# Altium PCB Switcher.PcbDoc (part 1 of 3)
Units mm, origin at the board's own origin, x right, y up, seen from the top; angles counter-clockwise.
Board outline 152.4 x 101.6 mm, 2 copper layers (Top Layer, Bottom Layer); 59 components, 74 nets, 310 pads, 234 vias.
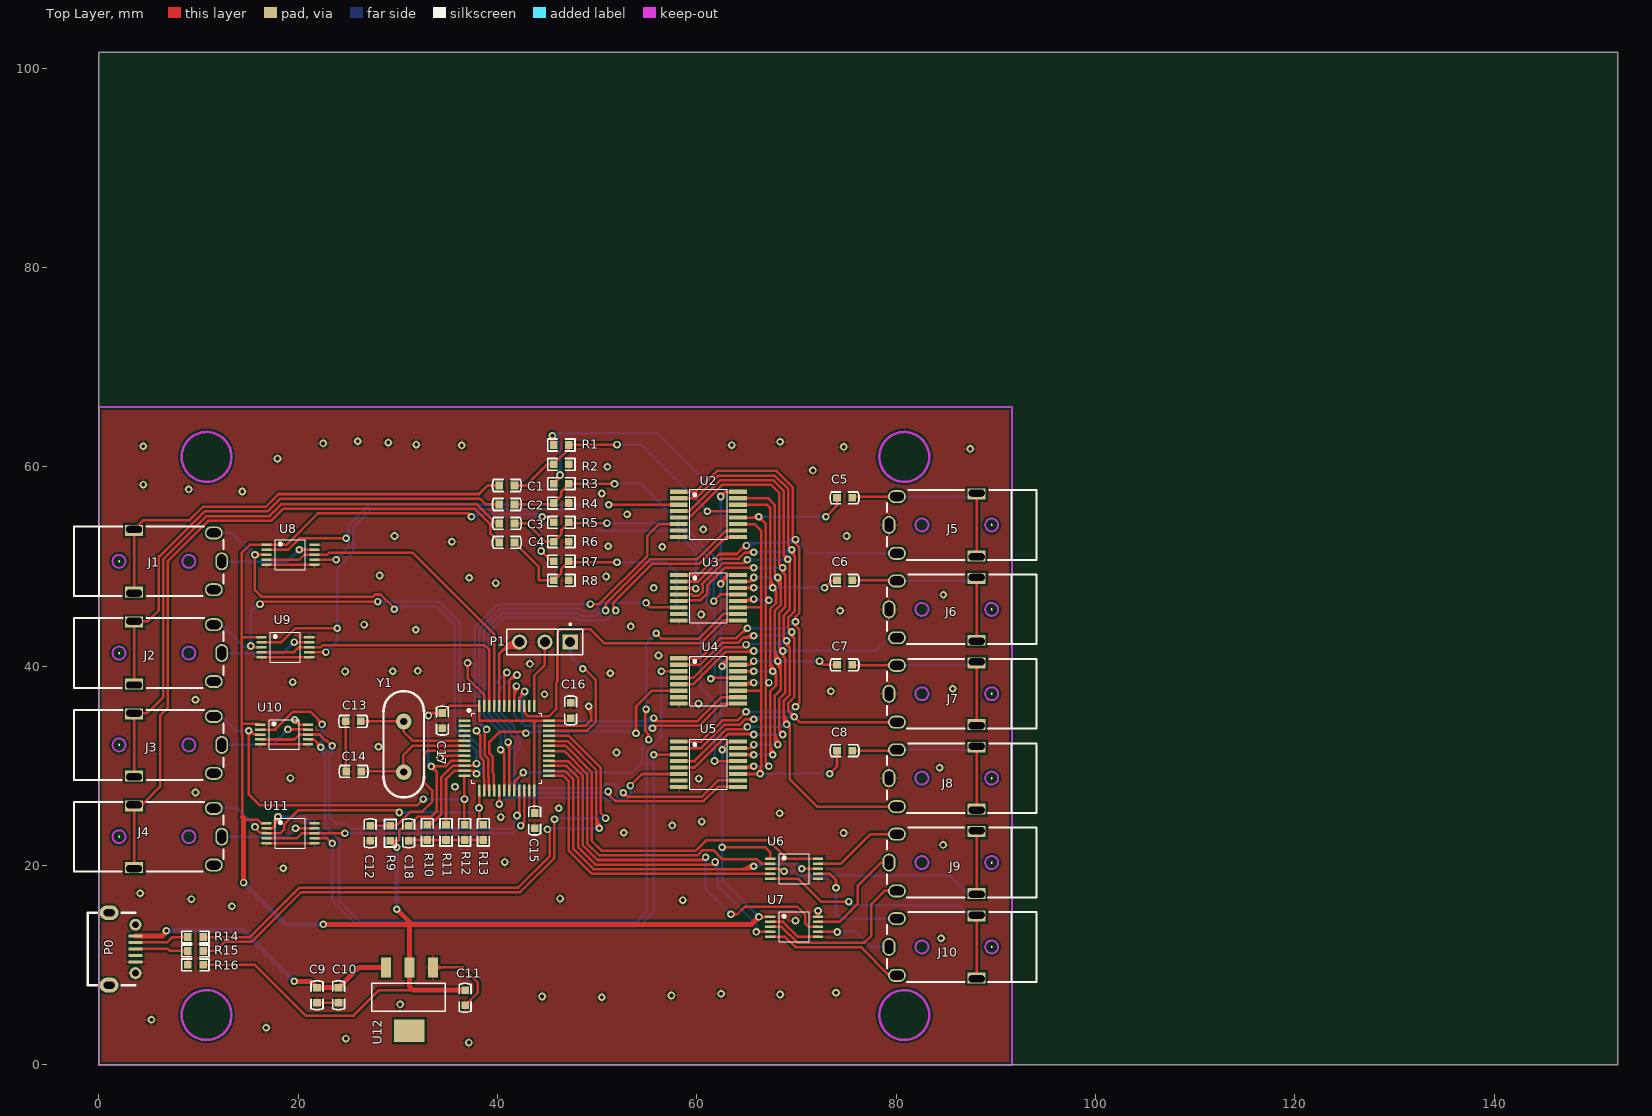
[diagram p0: Top Layer view]
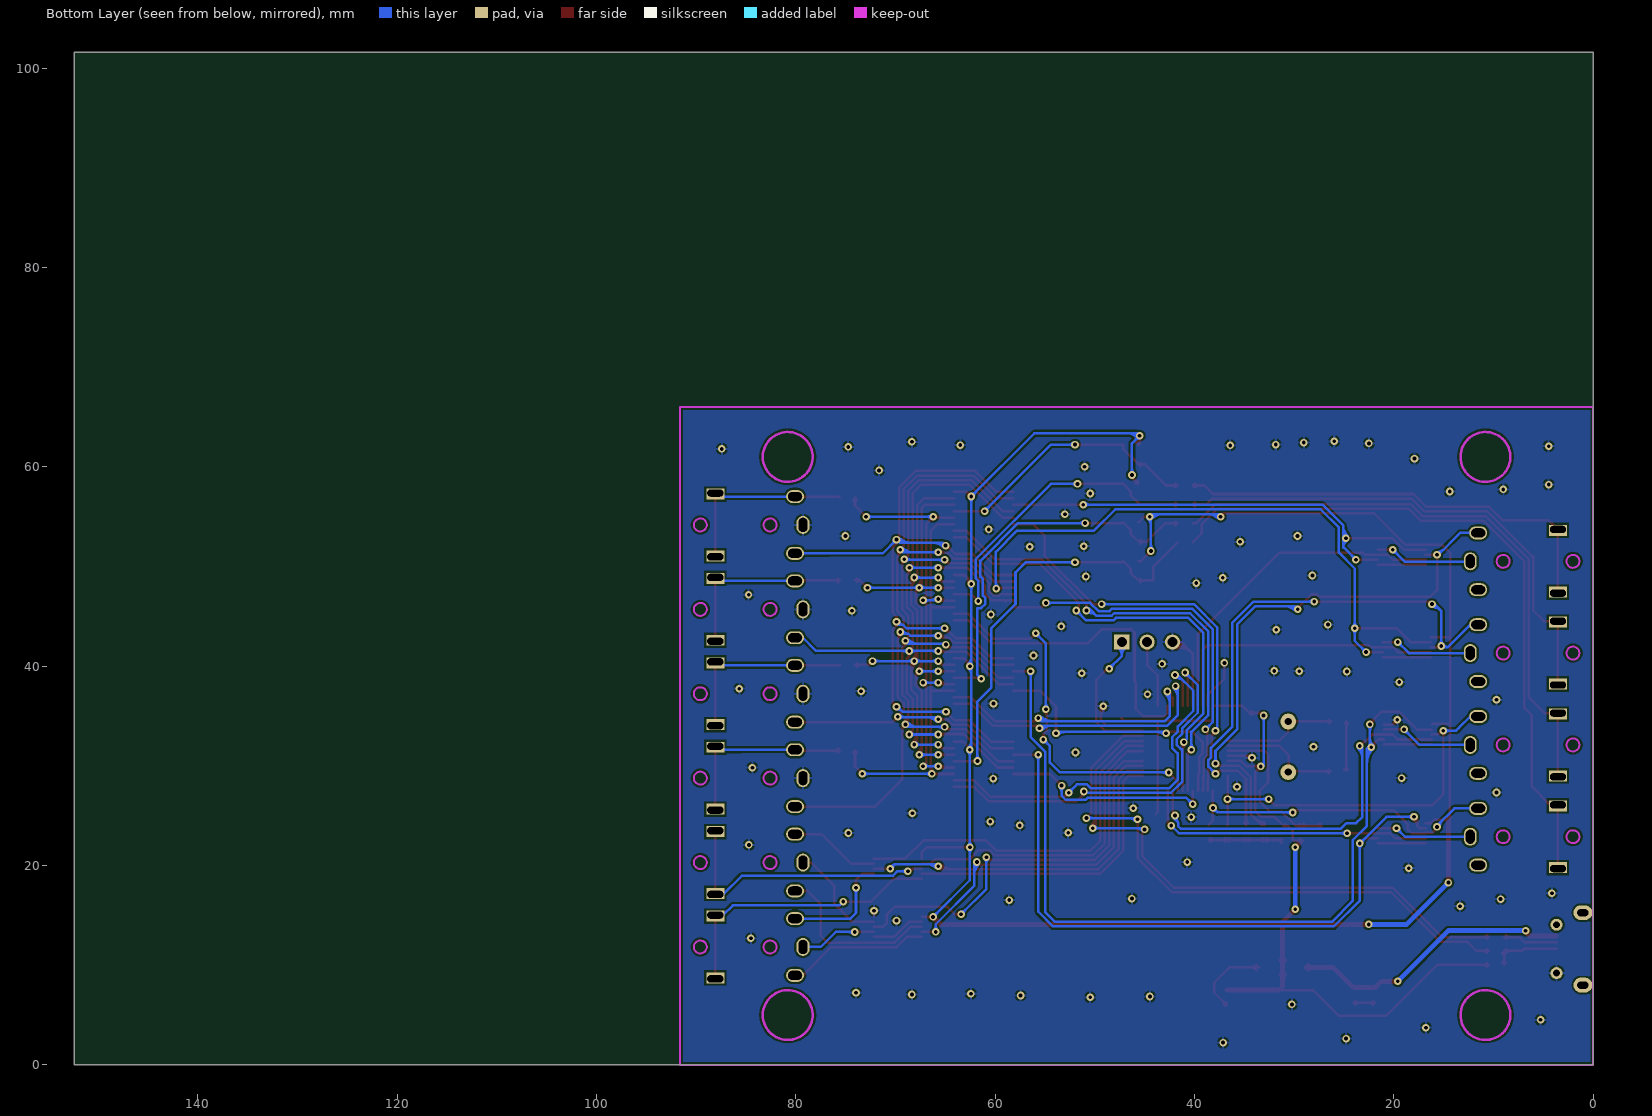
[diagram p1: Bottom Layer view, seen from below]

## Layer stack, top to bottom
Top Layer: signal copper 0.0356
Dielectric: dielectric 0.32, FR-4, Dk 4.8
Bottom Layer: signal copper 0.0356

## Board outline
-0.013,0 152.387,0 152.387,101.6 -0.013,101.6

## Design rules (kind name [scope] priority, off if disabled: settings)
Clearance Clearance_1 [All] p1 off: gap=0.254
Clearance [All] p2: gap=0.203
ComponentClearance [All] p1 off: gap=0.2 collisioncheckmode=3 verticalgap=0.2 showdistances=FALSE
HoleToHoleClearance [All] p1: gap=0.1 allowstackedmicrovias=TRUE
MinimumSolderMaskSliver [All] p1: minsoldermaskwidth=0.1
PolygonConnect [All] p1: connectstyle=Relief reliefconductorwidth=0.254 reliefentries=4 polygonreliefangle="90 Angle"
RoutingVias [All] p1: holewidth=0.711 width=1.27 viastyle="Through Hole" minholewidth=0.254 minwidth=0.508 maxholewidth=0.762 maxwidth=1.27
SilkToSilkClearance [All] p1: silktosilkclearance=0.1
SilkscreenOverComponentPads [All] p1: minsilkscreentomaskgap=0.1
SolderMaskExpansion [All] p1: expansion=0
Width [All] p1: maxlimit=0.5 minlimit=0.203 preferedwidth=0.254 minimp=50.000000 maximp=50.000000 favimp=50.000000
23 further rules are at their usual default settings.

## Components (designator, comment, footprint, x,y, rotation, side; value= is the part's Value field where it differs from the comment)
C1 "" 1608(0603C) 40.17,58.13 r0 top
C2 "" 1608(0603C) 40.17,56.225 r0 top
C3 "" 1608(0603C) 40.17,54.32 r0 top
C4 "" 1608(0603C) 40.17,52.415 r0 top
C5 "" 1608(0603C) 74.054,56.896 r0 top
C6 "" 1608(0603C) 74.054,48.616 r0 top
C7 "" 1608(0603C) 74.054,40.132 r0 top
C8 "" 1608(0603C) 74.054,31.521 r0 top
C9 "" 1608(0603C) 21.882,6.223 r90 top
C10 "" 1608(0603C) 24.041,6.223 r90 top
C11 "" 1608(0603C) 36.741,5.969 r90 top
C12 "" 1608(0603C) 27.216,22.479 r90 top
C13 "" 1608(0603C) 24.747,34.468 r0 top
C14 "" 1608(0603C) 24.798,29.439 r0 top
C15 "" 1608(0603C) 43.726,23.749 r90 top
C16 "" 1608(0603C) 47.327,36.322 r270 top
C17 "" 1608(0603C) 34.455,33.782 r90 top
C18 "" 1608(0603C) 31.084,22.479 r90 top
J1 "" PJ-322 -2.477,54.026 r0 top
J2 "" PJ-322 -2.477,44.814 r0 top
J3 "" PJ-322 -2.477,35.602 r0 top
J4 "" PJ-322 -2.477,26.391 r0 top
J5 "" PJ-322 94.069,50.673 r180 top
J6 "" PJ-322 94.069,42.205 r180 top
J7 "" PJ-322 94.069,33.736 r180 top
J8 "" PJ-322 94.069,25.268 r180 top
J9 "" PJ-322 94.069,16.8 r180 top
J10 "" PJ-322 94.069,8.331 r180 top
P0 "" USB_MICRO 3.67,11.633 r90 top
P1 "" SIP3 47.282,42.418 r180 top
R1 "" 1608(0603R) 47.155,62.194 r180 top
R2 "" 1608(0603R) 47.155,60.252 r180 top
R3 "" 1608(0603R) 47.155,58.311 r180 top
R4 "" 1608(0603R) 47.155,56.37 r180 top
R5 "" 1608(0603R) 47.155,54.429 r180 top
R6 "" 1608(0603R) 47.155,52.487 r180 top
R7 "" 1608(0603R) 47.155,50.546 r180 top
R8 "" 1608(0603R) 47.155,48.605 r180 top
R9 "" 1608(0603R) 29.248,24.003 r270 top
R10 "" 1608(0603R) 32.954,22.563 r90 top
R11 "" 1608(0603R) 34.824,22.563 r90 top
R12 "" 1608(0603R) 36.694,22.563 r90 top
R13 "" 1608(0603R) 38.564,22.563 r90 top
R14 "" 1608(0603R) 8.928,12.827 r0 top
R15 "" 1608(0603R) 8.928,11.43 r0 top
R16 "" 1608(0603R) 8.928,10.033 r0 top
U1 "f103c8t6" LQFP48 40.927,31.775 r0 top
U2 "SGM4782" TSSOP-16 58.179,57.506 r0 top
U3 "SGM4782" TSSOP-16 58.179,49.149 r0 top
U4 "SGM4782" TSSOP-16 58.179,40.792 r0 top
U5 "SGM4782" TSSOP-16 58.179,32.436 r0 top
U6 "SGM3005" MSOP-10 69.761,19.685 r0 top
U7 "SGM3005" MSOP-10 69.761,13.843 r0 top
U8 "SGM3005" MSOP-10 19.215,51.181 r0 top
U9 "SGM3005" MSOP-10 18.707,41.91 r0 top
U10 "SGM3005" MSOP-10 18.58,33.147 r0 top
U11 "SGM3005" MSOP-10 19.215,23.241 r0 top
U12 "" SOT-223 31.153,6.604 r90 top
Y1 "8MHz" XTAL1 30.589,34.442 r270 top

## Footprints (in the part's own frame and the unit in brackets; to place one, negate y for a bottom-side part, rotate by r counter-clockwise, add the part's x,y. Pads: shape width x height; smd on the part's side, far side on the other; paste and mask are expansions set on the pad)
1608(0603C) [mil]
  rect 30x30 smd: 1(0,0) 2(60,0)
  silkscreen extent -27,-23 87,23
1608(0603R) [mil]
  rect 30x30 smd: 1(0,0) 2(60,0)
  silkscreen extent -24,-23 84,23
LQFP48 [mm]
  rect 1.2x0.25 smd: 1(-4.25,2.75) 2(-4.25,2.25) 3(-4.25,1.75) 4(-4.25,1.25) 5(-4.25,0.75) 6(-4.25,0.25) 7(-4.25,-0.25) 8(-4.25,-0.75) 9(-4.25,-1.25) 10(-4.25,-1.75) 11(-4.25,-2.25) 12(-4.25,-2.75) 25(4.25,-2.75) 26(4.25,-2.25) 27(4.25,-1.75) 28(4.25,-1.25) 29(4.25,-0.75) 30(4.25,-0.25) 31(4.25,0.25) 32(4.25,0.75) 33(4.25,1.25) 34(4.25,1.75) 35(4.25,2.25) 36(4.25,2.75)
  rect 0.25x1.2 smd: 13(-2.75,-4.25) 14(-2.25,-4.25) 15(-1.75,-4.25) 16(-1.25,-4.25) 17(-0.75,-4.25) 18(-0.25,-4.25) 19(0.25,-4.25) 20(0.75,-4.25) 21(1.25,-4.25) 22(1.75,-4.25) 23(2.25,-4.25) 24(2.75,-4.25) 37(2.75,4.25) 38(2.25,4.25) 39(1.75,4.25) 40(1.25,4.25) 41(0.75,4.25) 42(0.25,4.25) 43(-0.25,4.25) 44(-0.75,4.25) 45(-1.25,4.25) 46(-1.75,4.25) 47(-2.25,4.25) 48(-2.75,4.25)
  silkscreen extent -3.92,-3.5 3.5,3.92
MSOP-10 [mm]
  rect 1.02x0.25 smd: 1(-2.4,1) 2(-2.4,0.5) 3(-2.4,0) 4(-2.4,-0.5) 5(-2.4,-1) 6(2.4,-1) 7(2.4,-0.5) 8(2.4,0) 9(2.4,0.5) 10(2.4,1)
  silkscreen extent -1.5,-1.5 1.5,1.5
PJ-322 [mm]
  rect 1.8x1.1 hole 0.7 slot 1.6 at 0 deg copper offset 0,0.1: 1(6,-6.7)
  rect 1.8x1.1 hole 0.7 slot 1.6 at 0 deg copper offset 0,-0.1: 1(6,-0.3)
  oval 1.8x1.3 hole 0.9 slot 1.4 at 0 deg: 2(14,-6.35) 3(14,-0.65)
  oval 1.3x1.8 hole 0.9 slot 1.4 at 90 deg: 4(14.8,-3.5)
  Keep-Out Layer circle w0.2: c11.5,-3.5 r0.65
  Keep-Out Layer circle w0.2: c4.5,-3.5 r0.65
  silkscreen extent 0,-7 15,0
SIP3 [mil]
  rect 60x60 hole 40: 1(0,0)
  round 60 hole 40: 2(100,0) 3(200,0)
  silkscreen extent -50,-72 250,50
SOT-223 [mil]
  rect 80x40 smd: 1(125,-93) 2(125,0) 3(125,93)
  rect 90x120 smd: 4(-125,0)
  silkscreen extent -48,-141 62,149
TSSOP-16 [mm]
  rect 1.78x0.42 smd: 1(0,0) 2(0,-0.65) 3(0,-1.3) 4(0,-1.95) 5(0,-2.6) 6(0,-3.25) 7(0,-3.9) 8(0,-4.55) 9(5.94,-4.55) 10(5.94,-3.9) 11(5.94,-3.25) 12(5.94,-2.6) 13(5.94,-1.95) 14(5.94,-1.3) 15(5.94,-0.65) 16(5.94,0)
  silkscreen extent 1.09,-4.77 4.85,0.23
USB_MICRO [mil] "USB Micro SMT 5S B"
  rect 11.81x54 smd: 1(51,0) 2(25.5,0) 3(0,0) 4(-25.5,0) 5(-51,0)
  oval 59.06x74.8 hole 27.56 slot 43.31 at 90 deg: 6(-143,104) 6(143,104)
  round 47.24 hole 27.5: 6(-95.5,0) 6(95.5,0)
  silkscreen extent -143,0 143,189
XTAL1 [mil]
  round 62 hole 28: 1(-0.36,-0.2) 2(199.64,-0.2)
  silkscreen extent -120,-80 300,80

## Part data
C1 C2 C3 C4 C5 C6 C7 C8 C9 C10 C11 C12 C13 C14 C15 C16 C17 C18: library part Cap, "Capacitor"
J1 J2 J3 J4 J6 J7 J8: library part seg-4
J5: library part seg-4, "OMTP"
J9 J10: library part CON4
P0: library part micro_usb
P1: library part "Header 3", "Header, 3-Pin"
R1 R2 R3 R4 R5 R6 R7 R8 R9 R10 R11 R12 R13 R14 R15 R16: library part Res3, "Resistor"
U12: library part ASM1117-3.3
Y1: library part XTAL, "Crystal Oscillator"

## Free pads (board coordinates)
  round 0 on Mech1: EndPad(64.119,31.786)
  round 0.254 smd: StartPad(64.119,56.856)

## Via types
v1: diameter 0.762, hole 0.381, Top Layer to Bottom Layer, 152 vias
v2: diameter 0.76, hole 0.38, Top Layer to Bottom Layer, 80 vias
v3: diameter 0.72, hole 0.38, Top Layer to Bottom Layer, 2 vias

## Nets (pads, with @x,y where several pads share a name; then routed paths per layer and width w, separated by ;. In a path a pad name is that pad's centre, name@x,y a point inside that pad or via, vN(x,y) a via of type N, cw(c..) or ccw(c..) an arc to the next point about the centre after c; other vN are vias at no path point)
3V3: C11.2 C15.2 C16.2 C17.2 C18.2 R1.2 R3.2 R5.2 R7.2 R9.2 R16.2 U1.9 U1.24 U1.36 U1.48 U2.16 U3.16 U4.16 U5.16 U6.1 U7.1 U8.1 U9.1 U10.1 U11.1 U12.2 | length 387.2
  Top Layer w0.254: R16.2@10.452,10.033 15.659,10.033 20.739,4.953 25.565,4.953 28.105,7.493 31.534,7.493 ; 14.329,42.91 U9.1@16.307,42.91 ; 14.364,34.239 16.088,34.239 U10.1@16.18,34.147 ; 14.389,24.892 14.389,33.081 14.313,33.157 14.313,51.359 15.135,52.181 U8.1@16.815,52.181 18.807,52.181 21.973,55.347 37.02,55.347 ; 14.516,24.765 14.694,24.587 15.954,24.587 16.3,24.241 U11.1@16.815,24.241 ; R9.2@29.248,22.479 30.01,22.479 30.137,22.606 30.137,23.495 30.645,24.003 ; v1(33.058,35.052) 33.312,35.306 C17.2@34.455,35.306 35.174,36.025 U1.48@38.177,36.025 38.177,34.544 43.609,34.544 43.677,34.476 ; v1@33.337,29.693 cw(c33.337,29.079) 33.771,29.513 cw(c34.205,29.947) v1@33.591,29.947 ; v1@33.517,29.767 cw(c33.951,29.333) 33.951,29.947 cw(c33.951,30.56) v1@33.517,30.126 ; U1.9@36.677,30.525 35.367,30.525 34.788,29.947 v1(33.337,29.947) 33.91,29.374 33.91,25.49 33.312,24.892 31.973,24.892 C18.2@31.084,24.003 30.645,24.003 ; v1(37.376,54.991) 37.02,55.347 ; C15.2@43.898,25.146 43.677,25.368 U1.24@43.677,27.525 43.677,34.476 ; v1(44.361,51.562) 45.377,50.546 R7.2@45.631,50.546 ; v1(44.488,54.991) 45.069,54.991 R5.2@45.631,54.429 ; v1@45.406,62.873 ccw(c46.136,63.069) R1.2@45.758,62.414 ; R1.2@45.411,62.321 ccw(c45.004,62.556) 45.458,62.677 ; v1(45.504,63.119) 45.504,62.321 R1.2@45.631,62.194 ; R3.2@45.631,58.311 46.266,58.946 v1(46.266,59.182) ; C16.2@47.327,34.798 47.055,34.525 U1.36@45.177,34.525 43.726,34.525 43.677,34.476 ; v1(62.522,21.844) 66.84,21.844 67.361,21.323 U6.1@67.361,20.685 ; v1(62.537,31.608) 62.537,31.771 63.202,32.436 U5.16@64.119,32.436 ; 62.715,57.363 ccw(c62.83,56.934) v1(62.395,57.023) ; 62.735,57.343 cw(c62.306,57.458) v1(62.395,57.023) ; 62.775,48.731 cw(c62.055,48.924) v1(62.395,48.26) ; 62.868,40.545 cw(c62.044,40.693) v1(62.522,40.005) ; U4.16@64.119,40.792 63.055,40.792 ; U3.16@64.119,49.149 63.03,49.149 62.395,48.514 v1(62.395,48.26) ; U2.16@64.119,57.506 62.878,57.506 v1(62.395,57.023) ; v1(66.221,14.843) U7.1@67.361,14.843 ; 11.065,10.033 cw(c11.065,10.646) 10.632,10.213 ccw(c11.065,10.646) 11.065,10.033 ; 11.065,10.033 ccw(c11.065,9.42) 10.632,9.853 cw(c11.065,9.42) 11.065,10.033 ; 29.861,22.479 cw(c29.861,23.092) 29.428,22.659 ccw(c29.861,23.092) 29.861,22.479 ; 29.861,22.479 ccw(c29.861,21.866) 29.428,22.299 cw(c29.861,21.866) 29.861,22.479 ; 30.645,24.003 cw(c30.645,23.751) 30.863,23.877 ccw(c30.645,23.751) 30.645,24.003 ; 30.645,24.003 ccw(c30.645,24.255) 30.863,24.129 cw(c30.645,24.255) 30.645,24.003 ; 33.842,35.306 cw(c33.842,34.693) 34.275,35.126 ccw(c33.842,34.693) 33.842,35.306 ; 33.842,35.306 ccw(c33.842,35.919) 34.275,35.486 cw(c33.842,35.919) 33.842,35.306 ; 37.02,55.347 cw(c36.757,55.084) 37.125,55.029 ccw(c36.757,55.084) 37.02,55.347 ; 37.02,55.347 ccw(c37.283,55.61) 37.338,55.242 cw(c37.283,55.61) 37.02,55.347 ; v1@45.396,62.889 cw(c45.2,62.474) 45.644,62.593 ; v1@45.396,62.889 cw(c45.2,62.474) 45.644,62.593 ; v1@45.396,62.889 cw(c45.2,62.474) 45.644,62.593 ; R1.2@45.504,62.506 cw(c46.117,62.506) 45.684,62.939 ccw(c46.117,62.506) R1.2@45.504,62.506 ; R1.2@45.504,62.506 ccw(c44.891,62.506) 45.324,62.939 cw(c44.891,62.506) R1.2@45.504,62.506 ; 45.644,62.593 cw(c46.083,62.71) v1@45.711,62.972 ; 45.644,62.593 cw(c46.083,62.71) v1@45.711,62.972 ; 45.644,62.593 cw(c46.083,62.71) v1@45.711,62.972 ; 46.065,58.745 cw(c45.631,59.178) 45.631,58.565 ccw(c45.631,59.178) 46.065,58.745 ; 46.065,58.745 ccw(c46.498,58.311) 45.885,58.311 cw(c46.498,58.311) 46.065,58.745 ; v1(62.395,48.26) cw(c63.008,48.26) 62.575,48.694 ccw(c63.008,48.26) v1(62.395,48.26) ; v1(62.522,40.005) cw(c63.027,40.047) 62.669,40.406 ccw(c63.027,40.047) v1(62.522,40.005) ; v1(62.522,40.005) 62.522,40.259 63.055,40.792 ; 62.829,57.457 cw(c62.395,57.89) 62.395,57.277 ccw(c62.395,57.89) 62.829,57.457 ; 62.829,57.457 ccw(c63.262,57.023) 62.649,57.023 cw(c63.262,57.023) 62.829,57.457 ; 63.055,40.792 ccw(c63.74,40.108) 62.775,40.026 cw(c63.74,40.108) 63.055,40.792 ; 66.834,14.843 cw(c66.834,15.456) 66.401,15.023 ccw(c66.834,15.456) 66.834,14.843 ; 66.834,14.843 ccw(c66.834,14.23) 66.401,14.663 cw(c66.834,14.23) 66.834,14.843 ; 15.578,34.239 cw(c15.578,33.93) 15.796,34.148 ccw(c15.578,33.93) 15.578,34.239 ; 16.211,24.33 ccw(c16.43,24.549) 16.43,24.239 cw(c16.43,24.549) 16.211,24.33 ; v1@45.504,63.114 ccw(c46.551,63.114) 45.811,62.373 cw(c46.551,63.114) v1@45.504,63.114 ; v1@62.649,48.26 cw(c63.875,48.26) 63.008,49.127 ccw(c63.875,48.26) v1@62.649,48.26
  Top Layer w0.5: 14.389,24.892 14.516,24.765 v1(14.516,18.288) ; v1(22.517,14.097) 31.153,14.097 ; R9.2@29.248,22.479 v1(29.883,21.844) ; v1(29.883,15.621) 31.153,14.351 31.153,14.097 ; C11.2@36.741,7.493 31.534,7.493 31.153,7.874 U12.2@31.153,9.779 31.153,14.097 ; v1(66.221,14.843) 65.475,14.097 31.153,14.097 ; 31.153,8.648 cw(c31.776,8.648) 31.335,9.089 ccw(c31.776,8.648) 31.153,8.648 ; 31.153,8.648 ccw(c30.53,8.648) 30.971,9.089 cw(c30.53,8.648) 31.153,8.648 ; 31.153,10.91 cw(c30.53,10.91) 30.971,10.469 ccw(c30.53,10.91) 31.153,10.91 ; 31.153,10.91 ccw(c31.776,10.91) 31.335,10.469 cw(c31.776,10.91) 31.153,10.91
  Bottom Layer w0.254: v1(33.058,35.052) 33.058,30.023 33.134,29.947 v1(33.337,29.947) ; v1@37.499,55.213 ccw(c37.63,55.449) 37.765,55.215 ccw(c37.9,54.982) v1@37.63,54.987 ; v1@37.545,55.18 ccw(c37.86,55.533) 38.097,55.124 ; 37.792,54.948 cw(c37.614,55.257) v1(37.376,54.991) ; 43.767,55.124 ccw(c44.004,55.533) v1@44.319,55.18 ; 44.072,54.948 ccw(c44.25,55.257) v1(44.488,54.991) ; v1@44.234,54.987 ccw(c43.964,54.982) 44.099,55.215 ccw(c44.234,55.449) v1@44.365,55.213 ; v1(44.361,51.562) 44.361,54.864 v1(44.488,54.991) ; v1@45.627,63.341 ccw(c45.758,63.577) 45.893,63.343 ccw(c46.028,63.11) v1@45.758,63.115 ; v1@45.673,63.308 ccw(c45.988,63.661) 46.225,63.252 ; 45.92,63.076 cw(c45.742,63.385) v1(45.504,63.119) ; v1(46.266,59.182) 46.266,62.357 v1(45.504,63.119) ; v1(66.221,14.843) 62.537,18.527 v1(62.537,31.608) 62.395,31.75 v1(62.395,48.26) v1(62.395,57.023) 56.045,63.373 45.758,63.373 v1(45.504,63.119) ; 33.058,34.439 cw(c33.671,34.439) 33.238,34.872 ccw(c33.671,34.439) 33.058,34.439 ; 33.058,34.439 ccw(c32.445,34.439) 32.878,34.872 cw(c32.445,34.439) 33.058,34.439 ; v1(37.376,54.991) cw(c37.989,54.378) 37.989,55.245 ccw(c37.989,54.378) v1(37.376,54.991) ; v1(37.376,54.991) 37.376,55.118 37.503,55.245 44.234,55.245 v1(44.488,54.991) ; 44.361,52.175 cw(c43.748,52.175) 44.181,51.742 ccw(c43.748,52.175) 44.361,52.175 ; 44.361,52.175 ccw(c44.974,52.175) 44.541,51.742 cw(c44.974,52.175) 44.361,52.175 ; v1(44.488,54.991) ccw(c43.875,54.378) 43.875,55.245 cw(c43.875,54.378) v1(44.488,54.991) ; v1(45.504,63.119) cw(c46.117,62.506) 46.117,63.373 ccw(c46.117,62.506) v1(45.504,63.119) ; 45.938,62.685 cw(c46.371,63.119) 45.758,63.119 ccw(c46.371,63.119) 45.938,62.685 ; 45.938,62.685 ccw(c45.504,62.252) 45.504,62.865 cw(c45.504,62.252) 45.938,62.685 ; 46.266,59.795 cw(c45.653,59.795) 46.086,59.362 ccw(c45.653,59.795) 46.266,59.795 ; 46.266,59.795 ccw(c46.879,59.795) 46.446,59.362 cw(c46.879,59.795) 46.266,59.795 ; 61.961,57.457 cw(c61.528,57.023) 62.141,57.023 ccw(c61.528,57.023) 61.961,57.457 ; 61.961,57.457 ccw(c62.395,57.89) 62.395,57.277 cw(c62.395,57.89) 61.961,57.457 ; 62.395,47.647 cw(c63.008,47.647) 62.575,48.08 ccw(c63.008,47.647) 62.395,47.647 ; 62.395,47.647 ccw(c61.782,47.647) 62.215,48.08 cw(c61.782,47.647) 62.395,47.647 ; 62.395,56.41 cw(c63.008,56.41) 62.575,56.843 ccw(c63.008,56.41) 62.395,56.41 ; 62.395,56.41 ccw(c61.782,56.41) 62.215,56.843 cw(c61.782,56.41) 62.395,56.41 ; 62.537,30.995 cw(c63.15,30.995) 62.716,31.429 ccw(c63.15,30.995) 62.537,30.995 ; 62.537,30.995 ccw(c61.923,30.995) 62.357,31.429 cw(c61.923,30.995) 62.537,30.995 ; 65.787,15.277 cw(c65.354,14.843) 65.967,14.843 ccw(c65.354,14.843) 65.787,15.277 ; 65.787,15.277 ccw(c66.221,15.71) 66.221,15.097 cw(c66.221,15.71) 65.787,15.277 ; v1@37.556,54.811 cw(c38.602,53.765) 38.602,55.245 ccw(c38.602,53.765) v1@37.556,54.811 ; 43.262,55.245 cw(c43.262,53.765) 44.308,54.811 ccw(c43.262,53.765) 43.262,55.245 ; 44.361,54.071 cw(c45.408,54.071) 44.668,54.811 ccw(c45.408,54.071) 44.361,54.071 ; v1@45.684,62.939 cw(c46.73,61.893) 46.73,63.373 ccw(c46.73,61.893) v1@45.684,62.939 ; v1@62.342,21.664 cw(c61.873,21.195) 62.537,21.195 ccw(c61.873,21.195) v1@62.342,21.664 ; v1@62.342,22.024 ccw(c61.873,22.493) 62.537,22.493 cw(c61.873,22.493) v1@62.342,22.024 ; 62.395,32.564 ccw(c63.492,32.564) 62.716,31.788 cw(c63.492,32.564) 62.395,32.564 ; 62.395,39.085 cw(c63.442,39.085) 62.702,39.825 ccw(c63.442,39.085) 62.395,39.085 ; 62.395,40.925 ccw(c63.442,40.925) 62.702,40.185 cw(c63.442,40.925) 62.395,40.925 ; 62.537,21.266 cw(c63.1,21.266) 62.702,21.664 ccw(c63.1,21.266) 62.537,21.266 ; 62.537,22.422 ccw(c63.1,22.422) 62.702,22.024 cw(c63.1,22.422) 62.537,22.422
  Bottom Layer w0.5: v1(14.516,18.288) 18.707,14.097 v1(22.517,14.097) ; v1(29.883,15.621) v1(29.883,21.844)
5V: C9.2 C10.2 P0.1 U12.3 | length 31.6
  Top Layer w0.5: P0.1@3.67,12.929 6.363,12.929 6.769,13.335 v1(6.769,13.462) ; v1(19.596,8.382) 21.247,8.382 C9.2@21.882,7.747 C10.2@24.041,7.747 26.073,9.779 U12.3@28.791,9.779 ; 28.168,9.779 cw(c28.168,9.156) 28.608,9.597 ccw(c28.168,9.156) 28.168,9.779 ; 28.168,9.779 ccw(c28.168,10.402) 28.608,9.961 cw(c28.168,10.402) 28.168,9.779 ; 6.456,13.022 ccw(c6.015,13.462) 6.638,13.462 cw(c6.015,13.462) 6.456,13.022
  Bottom Layer w0.5: v1(6.769,13.462) 14.516,13.462 v1(19.596,8.382)
GND: C9.1 C10.1 C11.1 C12.1 C13.1 C14.1 C15.1 C16.1 C17.1 C18.1 J5.4 J6.4 J7.4 J8.4 P0.5 P0.6@3.67,9.207 P1.3 R2.1 R4.1 R6.1 R8.1 R10.1 R11.1 R12.1 R13.1 U1.8 U1.23 U1.35 U1.44 U1.47 U2.8 U3.8 U4.8 U5.8 U6.6 U7.2 U7.6 U7.10 U8.5 U8.6 U8.10 U9.5 U9.6 U9.10 U10.5 U10.6 U10.10 U11.5 U11.6 U11.10 U12.1 | length 121.8
  Top Layer w0.254: U10.5@16.18,32.147 U10.6@20.98,32.147 ; U9.5@16.307,40.91 U9.6@21.107,40.91 ; U11.5@16.815,22.241 U11.6@21.615,22.241 ; U8.5@16.815,50.181 U8.6@21.615,50.181 ; v1@19.647,34.366 cw(c19.647,33.753) 20.08,34.187 cw(c20.514,34.62) v1@19.901,34.62 ; v1(19.647,34.62) 20.12,34.147 U10.10@20.98,34.147 ; C9.1@21.882,6.223 C10.1@24.041,6.223 ; C14.1@24.747,29.489 C13.1@24.747,34.468 ; C18.1@31.168,22.563 R10.1@32.954,22.563 R11.1@34.824,22.563 R12.1@36.694,22.563 R13.1@38.564,22.563 ; U12.1@33.515,9.779 36.487,9.779 38.011,8.255 38.011,7.239 C11.1@36.741,5.969 ; v1@34.406,30.631 cw(c35.359,29.677) 35.359,31.025 ; 34.746,31.025 ccw(c34.746,30.291) v1(34.226,30.81) 34.226,30.861 34.391,31.025 U1.8@36.677,31.025 ; v1@36.815,40.156 cw(c36.382,39.722) 36.995,39.722 cw(c37.608,39.722) v1@37.175,40.156 ; v1(36.995,40.335) 36.995,38.786 38.677,37.104 U1.47@38.677,36.025 ; U1.44@40.177,36.025 40.177,41.282 ; 41.039,41.783 ccw(c41.007,43.571) P1.3@42.293,42.33 ; 41.652,41.794 ccw(c41.631,42.969) P1.3@42.476,42.154 ; P1.3@42.202,42.164 P1.3@42.202,42.418 41.313,42.418 ; U1.35@45.177,34.025 48.835,34.025 49.39,34.581 49.39,35.738 v1(49.136,35.992) cw(c48.523,35.378) 49.39,35.378 ; v1@48.957,35.812 cw(c47.909,34.765) 49.39,34.765 ; U7.2@67.361,14.343 68.649,14.343 70.149,12.843 U7.6@72.161,12.843 ; v1@71.973,15.286 cw(c71.547,14.843) U7.10@72.161,14.843 72.161,15.456 v1(72.149,15.469) ; U7.10@72.161,14.885 cw(c72.732,14.885) v1@72.328,15.289 ; 22.495,6.223 cw(c22.495,6.836) 22.062,6.403 ccw(c22.495,6.836) 22.495,6.223 ; 22.495,6.223 ccw(c22.495,5.61) 22.062,6.043 cw(c22.495,5.61) 22.495,6.223 ; 23.428,6.223 cw(c23.428,5.61) 23.861,6.043 ccw(c23.428,5.61) 23.428,6.223 ; 23.428,6.223 ccw(c23.428,6.836) 23.861,6.403 cw(c23.428,6.836) 23.428,6.223 ; 24.747,33.855 cw(c25.36,33.855) 24.926,34.288 ccw(c25.36,33.855) 24.747,33.855 ; 24.747,33.855 ccw(c24.134,33.855) 24.567,34.288 cw(c24.134,33.855) 24.747,33.855 ; 32.34,22.563 cw(c32.34,21.95) 32.774,22.383 ccw(c32.34,21.95) 32.34,22.563 ; 32.34,22.563 ccw(c32.34,23.176) 32.774,22.743 cw(c32.34,23.176) 32.34,22.563 ; 33.567,22.563 cw(c33.567,23.176) 33.133,22.743 ccw(c33.567,23.176) 33.567,22.563 ; 33.567,22.563 ccw(c33.567,21.95) 33.133,22.383 cw(c33.567,21.95) 33.567,22.563 ; 34.211,22.563 cw(c34.211,21.95) 34.644,22.383 ccw(c34.211,21.95) 34.211,22.563 ; 34.211,22.563 ccw(c34.211,23.176) 34.644,22.743 cw(c34.211,23.176) 34.211,22.563 ; 34.435,9.779 cw(c34.435,10.699) 33.785,10.048 ccw(c34.435,10.699) 34.435,9.779 ; 34.435,9.779 ccw(c34.435,8.859) 33.785,9.51 cw(c34.435,8.859) 34.435,9.779 ; 35.437,22.563 cw(c35.437,23.176) 35.003,22.743 ccw(c35.437,23.176) 35.437,22.563 ; 35.437,22.563 ccw(c35.437,21.95) 35.003,22.383 cw(c35.437,21.95) 35.437,22.563 ; 36.081,22.563 cw(c36.081,21.95) 36.515,22.383 ccw(c36.081,21.95) 36.081,22.563 ; 36.081,22.563 ccw(c36.081,23.176) 36.515,22.743 cw(c36.081,23.176) 36.081,22.563 ; 37.175,6.403 cw(c36.741,6.836) 36.741,6.223 ccw(c36.741,6.836) 37.175,6.403 ; 37.175,6.403 ccw(c37.608,5.969) 36.995,5.969 cw(c37.608,5.969) 37.175,6.403 ; 37.307,22.563 cw(c37.307,23.176) 36.874,22.743 ccw(c37.307,23.176) 37.307,22.563 ; 37.307,22.563 ccw(c37.307,21.95) 36.874,22.383 cw(c37.307,21.95) 37.307,22.563 ; 37.951,22.563 cw(c37.951,21.95) 38.385,22.383 ccw(c37.951,21.95) 37.951,22.563 ; 37.951,22.563 ccw(c37.951,23.176) 38.385,22.743 cw(c37.951,23.176) 37.951,22.563 ; 40.177,41.282 cw(c41.573,39.886) 42.049,41.802 ccw(c41.573,39.886) 40.177,41.282 ; 40.177,41.282 41.313,42.418 ; 41.313,42.418 cw(c41.313,42.113) 41.601,42.212 ccw(c41.313,42.113) 41.313,42.418 ; 41.313,42.418 ccw(c41.313,42.723) 41.601,42.624 cw(c41.313,42.723) 41.313,42.418 ; C14.1@24.618,29.618 ccw(c24.307,29.929) 24.747,29.929 cw(c24.307,29.929) C14.1@24.618,29.618 ; 24.747,30.174 ccw(c25.533,30.174) 24.977,29.618 cw(c25.533,30.174) 24.747,30.174 ; C18.1@31.263,22.299 cw(c31.9,21.663) 31.9,22.563 ccw(c31.9,21.663) C18.1@31.263,22.299 ; C18.1@31.263,22.659 ccw(c31.494,22.889) 31.494,22.563 cw(c31.494,22.889) C18.1@31.263,22.659 ; 40.494,41.599 cw(c41.699,40.395) 42.11,42.048 ccw(c41.699,40.395) 40.494,41.599 ; 40.812,41.917 cw(c41.826,40.904) 42.171,42.295 ccw(c41.826,40.904) 40.812,41.917 ; 41.13,42.235 cw(c41.952,41.413) 42.233,42.541 ccw(c41.952,41.413) 41.13,42.235
  other v2: 37.122,2.235 24.778,2.642 16.777,3.734 5.27,4.521 30.213,6.071 50.457,6.782 44.463,6.858 57.442,6.96 68.339,7.061 62.42,7.137 73.952,7.239 84.493,12.7 69.888,14.478 13.348,15.926 58.585,16.535 9.284,16.637 46.266,16.688 4.127,17.221 18.504,19.736 40.729,20.345 84.696,22.073 74.714,23.266 52.667,23.292 57.518,24.028 60.49,24.409 40.322,24.867 68.288,25.248 46.139,25.756 9.69,27.33 35.725,27.915 60.185,28.727 19.215,28.778 84.341,29.82 51.93,31.344 28.054,31.928 60.16,36.246 9.69,36.627 73.444,37.49 85.661,37.744 19.444,38.405 51.295,39.294 24.701,39.472 29.477,39.497 31.991,39.522 43.243,40.234 56.147,41.072 31.788,43.663 53.353,43.993 26.606,44.171 60.414,45.187 74.358,45.568 39.814,48.336 37.147,48.87 50.889,48.997 28.156,49.098 56.528,51.994 51.092,52.045 35.42,52.476 29.654,53.061 75.019,53.061 60.642,53.721 52.997,55.245 50.457,57.328 14.389,57.531 9.004,57.734 4.458,58.217 71.641,59.639 51.016,60.02 17.92,60.833 87.414,61.798 74.739,62.001 4.458,62.078 36.411,62.154 63.487,62.179 31.839,62.23 22.492,62.357 29.019,62.433 68.339,62.509 25.971,62.56
  other v3: 44.717,37.186 84.722,47.168
NetC1_1: C1.1 J1.1 | length 46.8
  Top Layer w0.254: J1.1@3.523,47.326 J1.1@3.523,53.726 4.458,54.66 9.096,54.66 10.417,55.981 16.742,55.981 18.038,57.277 38.138,57.277 38.991,58.13 C1.1@40.17,58.13 ; 39.557,58.13 cw(c39.557,57.517) 39.99,57.95 ccw(c39.557,57.517) 39.557,58.13 ; 39.557,58.13 ccw(c39.557,58.743) 39.99,58.309 cw(c39.557,58.743) 39.557,58.13
NetC1_2: C1.2 R1.1 R2.2 U2.13 | length 34.8
  Top Layer w0.254: C1.2@41.694,58.13 42.837,58.13 44.96,60.252 R2.2@45.631,60.252 45.631,60.289 47.155,61.813 R1.1@47.155,62.194 47.191,62.23 v1(51.981,62.23) ; v1(61.055,55.556) U2.13@64.119,55.556 ; 42.307,58.13 cw(c42.307,58.743) 41.874,58.309 ccw(c42.307,58.743) 42.307,58.13 ; 42.307,58.13 ccw(c42.307,57.517) 41.874,57.95 cw(c42.307,57.517) 42.307,58.13 ; 45.018,60.252 cw(c45.018,59.639) 45.451,60.073 ccw(c45.018,59.639) 45.018,60.252 ; 45.018,60.252 ccw(c45.018,60.866) 45.451,60.432 cw(c45.018,60.866) 45.018,60.252
  Bottom Layer w0.254: v1(51.981,62.23) 54.38,62.23 v1(61.055,55.556) ; 52.594,62.23 cw(c52.594,62.843) 52.161,62.41 ccw(c52.594,62.843) 52.594,62.23 ; 52.594,62.23 ccw(c52.594,61.617) 52.161,62.05 cw(c52.594,61.617) 52.594,62.23 ; 60.621,55.989 cw(c60.187,55.556) 60.801,55.556 ccw(c60.187,55.556) 60.621,55.989 ; 60.621,55.989 ccw(c61.055,56.423) 61.055,55.81 cw(c61.055,56.423) 60.621,55.989
NetC2_1: C2.1 J2.1 | length 53.5
  Top Layer w0.254: J2.1@3.523,38.114 J2.1@3.523,44.514 4.928,44.514 6.007,45.593 6.007,51.054 6.136,51.054 10.606,55.524 16.931,55.524 18.227,56.82 38.214,56.82 38.809,56.225 C2.1@40.17,56.225 ; 39.557,56.225 cw(c39.557,55.612) 39.99,56.045 ccw(c39.557,55.612) 39.557,56.225 ; 39.557,56.225 ccw(c39.557,56.838) 39.99,56.404 cw(c39.557,56.838) 39.557,56.225
NetC2_2: C2.2 R3.1 R4.2 U3.13 | length 35.4
  Top Layer w0.254: C2.2@41.694,56.225 45.486,56.225 R4.2@45.631,56.37 46.393,57.132 46.393,57.549 R3.1@47.155,58.311 47.173,58.293 v1(51.727,58.293) ; v1(61.684,46.533) 62.35,47.199 U3.13@64.119,47.199 ; 42.307,56.225 cw(c42.307,56.838) 41.874,56.404 ccw(c42.307,56.838) 42.307,56.225 ; 42.307,56.225 ccw(c42.307,55.612) 41.874,56.045 cw(c42.307,55.612) 42.307,56.225
  Bottom Layer w0.254: v1(51.727,58.293) 54.394,58.293 61.938,50.749 61.938,48.809 61.684,48.555 v1(61.684,46.533) ; 52.34,58.293 cw(c52.34,58.906) 51.907,58.473 ccw(c52.34,58.906) 52.34,58.293 ; 52.34,58.293 ccw(c52.34,57.68) 51.907,58.113 cw(c52.34,57.68) 52.34,58.293
NetC3_1: C3.1 J3.1 | length 60.6
  Top Layer w0.254: J3.1@3.523,28.902 J3.1@3.523,35.302 4.86,35.302 6.464,36.906 6.464,50.735 10.796,55.067 17.121,55.067 18.315,56.261 37.884,56.261 39.825,54.32 C3.1@40.17,54.32
NetC3_2: C3.2 R5.1 R6.2 U4.13 | length 46.3
  Top Layer w0.254: C3.2@41.694,54.32 42.964,54.32 44.796,52.487 R6.2@45.631,52.487 46.393,53.249 46.393,53.685 47.137,54.429 R5.1@47.155,54.429 47.228,54.356 v1(50.965,54.356) ; v1(61.379,38.735) 61.486,38.842 U4.13@64.119,38.842 ; 42.307,54.32 cw(c42.307,54.933) 41.874,54.499 ccw(c42.307,54.933) 42.307,54.32 ; 42.307,54.32 ccw(c42.307,53.707) 41.874,54.14 cw(c42.307,53.707) 42.307,54.32 ; 45.018,52.487 cw(c45.018,51.874) 45.451,52.308 ccw(c45.018,51.874) 45.018,52.487 ; 45.018,52.487 ccw(c45.018,53.1) 45.451,52.667 cw(c45.018,53.1) 45.018,52.487
  Bottom Layer w0.254: v1(50.965,54.356) 57.685,54.356 61.481,50.56 61.481,48.998 61.227,48.744 61.227,47.082 60.973,46.828 60.973,46.238 61.389,45.822 61.785,45.822 61.785,39.141 ; v1(61.379,38.735) 61.785,39.141 ; 51.578,54.356 cw(c51.578,54.969) 51.145,54.536 ccw(c51.578,54.969) 51.578,54.356 ; 51.578,54.356 ccw(c51.578,53.743) 51.145,54.176 cw(c51.578,53.743) 51.578,54.356 ; 61.785,39.141 cw(c61.416,39.51) 61.391,38.989 ccw(c61.416,39.51) 61.785,39.141 ; 61.785,39.141 ccw(c62.154,38.772) 61.633,38.747 cw(c62.154,38.772) 61.785,39.141
NetC4_1: C4.1 J4.1 | length 70.1
  Top Layer w0.254: J4.1@3.523,19.691 J4.1@3.523,26.091 4.311,26.091 6.134,27.914 6.134,35.052 6.921,35.839 6.921,50.546 10.985,54.61 17.31,54.61 18.504,55.804 37.695,55.804 39.281,54.218 39.281,53.304 C4.1@40.17,52.415
NetC4_2: C4.2 R7.1 R8.2 U5.13 | length 48.8
  Top Layer w0.254: C4.2@41.694,52.415 44.107,50.002 44.107,48.605 R8.2@45.631,48.605 46.393,49.367 46.393,49.784 R7.1@47.155,50.546 47.282,50.419 v1(51.981,50.419) ; v1(61.766,30.486) U5.13@64.119,30.486 ; 45.018,48.605 cw(c45.018,47.992) 45.451,48.425 ccw(c45.018,47.992) 45.018,48.605 ; 45.018,48.605 ccw(c45.018,49.218) 45.451,48.784 cw(c45.018,49.218) 45.018,48.605
  Bottom Layer w0.254: v1(51.981,50.419) 56.934,50.419 57.95,49.403 57.95,46.228 60.363,43.815 60.363,37.846 61.766,36.443 v1(61.766,30.486) ; 52.594,50.419 cw(c52.594,51.032) 52.161,50.599 ccw(c52.594,51.032) 52.594,50.419 ; 52.594,50.419 ccw(c52.594,49.806) 52.161,50.239 cw(c52.594,49.806) 52.594,50.419 ; 61.766,31.099 cw(c61.153,31.099) 61.586,30.665 ccw(c61.153,31.099) 61.766,31.099 ; 61.766,31.099 ccw(c62.379,31.099) 61.945,30.665 cw(c62.379,31.099) 61.766,31.099
NetC5_1: C5.1 U2.12 U3.12 U4.12 U5.12 | length 82.9
  Top Layer w0.254: U5.12@64.119,29.836 65.561,29.836 v1(65.697,29.972) ; U4.12@64.119,38.192 65.535,38.192 v1(65.697,38.354) ; U3.12@64.119,46.549 65.51,46.549 v1(65.697,46.736) ; U2.12@64.119,54.906 66.12,54.906 v1(66.205,54.991) ; U5.12@64.87,29.794 cw(c65.077,29.675) 65.016,29.906 ; U4.12@64.87,38.151 cw(c65.124,38.004) 65.048,38.287 ; 65.118,38.303 cw(c65.255,38.066) v1@65.484,38.215 ; 66.525,54.651 cw(c66.64,55.08) v1(66.205,54.991) ; 66.545,54.671 ccw(c66.116,54.556) v1(66.205,54.991) ; v1@67.094,29.972 67.094,30.099 66.889,30.304 ; v1(72.936,54.991) 74.054,56.109 C5.1@74.054,56.896 ; v1(65.697,38.354) cw(c65.307,38.744) 65.307,38.192 ccw(c65.307,38.744) v1(65.697,38.354) ; v1(65.697,46.736) cw(c65.246,47.187) 65.246,46.549 ccw(c65.246,47.187) v1(65.697,46.736) ; v1(66.205,54.991) 66.889,54.307 66.889,46.941 ; 66.639,54.557 cw(c67.072,54.991) 66.459,54.991 ccw(c67.072,54.991) 66.639,54.557 ; 66.639,54.557 ccw(c66.205,54.124) 66.205,54.737 cw(c66.205,54.124) 66.639,54.557 ; 66.889,30.304 cw(c66.673,30.087) 66.972,30.024 ccw(c66.673,30.087) 66.889,30.304 ; 66.889,30.304 ccw(c67.106,30.52) 67.169,30.221 cw(c67.106,30.52) 66.889,30.304 ; 66.889,30.304 66.889,38.022 ; 66.889,38.022 cw(c67.106,37.806) 67.169,38.105 ccw(c67.106,37.806) 66.889,38.022 ; 66.889,38.022 ccw(c66.673,38.239) 66.972,38.302 cw(c66.673,38.239) 66.889,38.022 ; 66.889,38.022 v1(67.221,38.354) 66.889,38.686 ; 66.889,38.686 cw(c66.673,38.469) 66.972,38.406 ccw(c66.673,38.469) 66.889,38.686 ; 66.889,38.686 ccw(c67.106,38.902) 67.169,38.603 cw(c67.106,38.902) 66.889,38.686 ; 66.889,38.686 66.889,46.277 ; 66.889,46.277 cw(c67.106,46.061) 67.169,46.36 ccw(c67.106,46.061) 66.889,46.277 ; 66.889,46.277 ccw(c66.673,46.494) 66.972,46.557 cw(c66.673,46.494) 66.889,46.277 ; 66.889,46.277 v1(67.221,46.609) 66.889,46.941 ; 66.889,46.941 cw(c66.673,46.724) 66.972,46.661 ccw(c66.673,46.724) 66.889,46.941 ; 66.889,46.941 ccw(c67.106,47.157) 67.169,46.858 cw(c67.106,47.157) 66.889,46.941 ; 74.054,56.283 cw(c74.667,56.283) 74.233,56.716 ccw(c74.667,56.283) 74.054,56.283 ; 74.054,56.283 ccw(c73.44,56.283) 73.874,56.716 cw(c73.44,56.283) 74.054,56.283 ; U3.12@64.632,46.549 ccw(c64.632,47.801) 65.517,46.916 cw(c64.632,47.801) U3.12@64.632,46.549 ; U4.12@64.694,38.192 ccw(c64.694,39.357) 65.517,38.534 cw(c64.694,39.357) U4.12@64.694,38.192 ; U5.12@64.755,29.836 ccw(c64.755,30.914) 65.517,30.152 cw(c64.755,30.914) U5.12@64.755,29.836 ; 65.386,54.906 ccw(c65.386,55.81) 66.025,55.171 cw(c65.386,55.81) 65.386,54.906 ; 65.798,54.906 cw(c65.798,54.584) 66.025,54.811 ccw(c65.798,54.584) 65.798,54.906
  Bottom Layer w0.254: v1(65.697,29.972) v1(67.221,29.972) ; v1(65.697,38.354) v1(67.221,38.354) ; v1(65.697,46.736) 65.824,46.609 v1(67.221,46.609) ; v1(66.205,54.991) v1(72.936,54.991) ; 66.31,29.972 cw(c66.31,30.585) 65.877,30.152 ccw(c66.31,30.585) 66.31,29.972 ; 66.31,29.972 ccw(c66.31,29.359) 65.877,29.792 cw(c66.31,29.359) 66.31,29.972 ; 66.31,38.354 cw(c66.31,38.967) 65.877,38.534 ccw(c66.31,38.967) 66.31,38.354 ; 66.31,38.354 ccw(c66.31,37.741) 65.877,38.174 cw(c66.31,37.741) 66.31,38.354 ; 66.608,29.972 cw(c66.608,29.359) 67.041,29.792 ccw(c66.608,29.359) 66.608,29.972 ; 66.608,29.972 ccw(c66.608,30.585) 67.041,30.152 cw(c66.608,30.585) 66.608,29.972 ; 66.608,38.354 cw(c66.608,37.741) 67.041,38.174 ccw(c66.608,37.741) 66.608,38.354 ; 66.608,38.354 ccw(c66.608,38.967) 67.041,38.534 cw(c66.608,38.967) 66.608,38.354 ; 66.608,46.609 cw(c66.608,45.996) 67.041,46.429 ccw(c66.608,45.996) 66.608,46.609 ; 66.608,46.609 ccw(c66.608,47.222) 67.041,46.789 cw(c66.608,47.222) 66.608,46.609 ; 66.818,54.991 cw(c66.818,55.604) 66.385,55.171 ccw(c66.818,55.604) 66.818,54.991 ; 66.818,54.991 ccw(c66.818,54.378) 66.385,54.811 cw(c66.818,54.378) 66.818,54.991 ; 72.323,54.991 cw(c72.323,54.378) 72.756,54.811 ccw(c72.323,54.378) 72.323,54.991 ; 72.323,54.991 ccw(c72.323,55.604) 72.756,55.171 cw(c72.323,55.604) 72.323,54.991 ; v1@65.877,46.916 ccw(c66.617,47.656) 66.617,46.609 cw(c66.617,47.656) v1@65.877,46.916
NetC5_2: C5.2 J5.1 J5.2 | length 18.3
  Top Layer w0.254: C5.2@75.578,56.896 75.705,57.023 J5.2@79.281,57.023 ; J5.1@88.069,50.973 J5.1@88.069,57.373
  Bottom Layer w0.254: J5.2@80.069,57.023 87.719,57.023 J5.1@88.069,57.373
NetC6_1: C6.1 U2.14 U3.14 U4.14 U5.14 | length 84.2
  Top Layer w0.254: U5.14@64.119,31.136 65.676,31.136 v1(65.697,31.115) ; U4.14@64.119,39.492 v1(65.702,39.492) ; U3.14@64.119,47.849 65.667,47.849 v1(65.697,47.879) ; U2.14@64.119,56.206 67.021,56.206 67.346,55.88 67.346,48.135 v1(67.602,47.879) ; v1@67.379,31.237 ccw(c67.138,31.369) 67.376,31.506 ccw(c67.614,31.644) v1@67.608,31.369 ; v1@67.379,39.619 ccw(c67.138,39.751) 67.376,39.888 ccw(c67.614,40.026) v1@67.608,39.751 ; v1@67.379,48.001 ccw(c67.138,48.133) 67.376,48.27 ccw(c67.614,48.408) v1@67.608,48.133 ; v1(72.809,47.879) 73.546,48.616 ; C6.1@74.054,48.616 73.546,48.616 ; 65.088,39.492 cw(c65.088,38.879) 65.522,39.313 ccw(c65.088,38.879) 65.088,39.492 ; 65.088,39.492 ccw(c65.088,40.106) 65.522,39.672 cw(c65.088,40.106) 65.088,39.492 ; v1(67.602,31.115) cw(c68.219,31.732) 67.346,31.732 ccw(c68.219,31.732) v1(67.602,31.115) ; v1(67.602,31.115) 67.346,31.371 67.346,37.474 67.932,38.059 67.932,39.167 ; v1(67.602,39.497) cw(c68.219,40.114) 67.346,40.114 ccw(c68.219,40.114) v1(67.602,39.497) ; v1(67.602,39.497) 67.346,39.753 67.346,45.729 67.932,46.314 67.932,47.549 ; v1(67.602,39.497) 67.932,39.167 ; v1(67.602,47.879) cw(c68.219,48.496) 67.346,48.496 ccw(c68.219,48.496) v1(67.602,47.879) ; v1(67.602,47.879) 67.932,47.549 ; 67.932,39.167 cw(c68.145,39.38) 67.85,39.444 ccw(c68.145,39.38) 67.932,39.167 ; 67.932,39.167 ccw(c67.719,38.954) 67.655,39.249 cw(c67.719,38.954) 67.932,39.167 ; 67.932,47.549 cw(c68.145,47.762) 67.85,47.826 ccw(c68.145,47.762) 67.932,47.549 ; 67.932,47.549 ccw(c67.719,47.336) 67.655,47.631 cw(c67.719,47.336) 67.932,47.549 ; 73.546,48.616 cw(c73.546,48.235) 73.85,48.463 ccw(c73.546,48.235) 73.546,48.616 ; 73.546,48.616 ccw(c73.546,48.997) 73.85,48.768 cw(c73.546,48.997) 73.546,48.616 ; 65.011,47.849 ccw(c65.011,48.565) 65.517,48.059 cw(c65.011,48.565) 65.011,47.849 ; 65.034,31.136 cw(c65.034,30.452) 65.517,30.935 ccw(c65.034,30.452) 65.034,31.136 ; 65.134,31.136 ccw(c65.134,31.678) 65.517,31.295 cw(c65.134,31.678) 65.134,31.136 ; 65.156,47.849 cw(c65.156,47.338) 65.517,47.699 ccw(c65.156,47.338) 65.156,47.849 ; 67.346,32.345 ccw(c68.832,32.345) 67.782,31.295 cw(c68.832,32.345) 67.346,32.345 ; 67.346,40.727 ccw(c68.832,40.727) 67.782,39.677 cw(c68.832,40.727) 67.346,40.727 ; 67.346,49.109 ccw(c68.832,49.109) 67.782,48.059 cw(c68.832,49.109) 67.346,49.109
  Bottom Layer w0.254: v1(65.697,31.115) v1(67.602,31.115) ; v1(65.697,47.879) v1(67.602,47.879) v1(72.809,47.879) ; v1(65.702,39.492) 67.597,39.492 v1(67.602,39.497) ; 66.31,31.115 cw(c66.31,31.728) 65.877,31.295 ccw(c66.31,31.728) 66.31,31.115 ; 66.31,31.115 ccw(c66.31,30.502) 65.877,30.935 cw(c66.31,30.502) 66.31,31.115 ; 66.31,47.879 cw(c66.31,48.492) 65.877,48.059 ccw(c66.31,48.492) 66.31,47.879 ; 66.31,47.879 ccw(c66.31,47.266) 65.877,47.699 cw(c66.31,47.266) 66.31,47.879 ; 66.315,39.492 cw(c66.315,40.106) 65.881,39.672 ccw(c66.315,40.106) 66.315,39.492 ; 66.315,39.492 ccw(c66.315,38.879) 65.881,39.313 cw(c66.315,38.879) 66.315,39.492 ; 66.989,31.115 cw(c66.989,30.502) 67.422,30.935 ccw(c66.989,30.502) 66.989,31.115 ; 66.989,31.115 ccw(c66.989,31.728) 67.422,31.295 cw(c66.989,31.728) 66.989,31.115 ; 66.989,47.879 cw(c66.989,47.266) 67.422,47.699 ccw(c66.989,47.266) 66.989,47.879 ; 66.989,47.879 ccw(c66.989,48.492) 67.422,48.059 cw(c66.989,48.492) 66.989,47.879 ; 68.215,47.879 cw(c68.215,48.492) 67.782,48.059 ccw(c68.215,48.492) 68.215,47.879 ; 68.215,47.879 ccw(c68.215,47.266) 67.782,47.699 cw(c68.215,47.266) 68.215,47.879 ; 72.196,47.879 cw(c72.196,47.266) 72.629,47.699 ccw(c72.196,47.266) 72.196,47.879 ; 72.196,47.879 ccw(c72.196,48.492) 72.629,48.059 cw(c72.196,48.492) 72.196,47.879 ; 66.978,39.492 ccw(c66.978,40.121) 67.422,39.677 cw(c66.978,40.121) 66.978,39.492 ; 67,39.492 cw(c67,38.895) 67.422,39.317 ccw(c67,38.895) 67,39.492
NetC6_2: C6.2 J6.1 J6.2 | length 25
  Top Layer w0.254: C6.2@75.578,48.616 79.22,48.616 J6.2@79.281,48.555 ; J6.1@88.069,42.505 J6.1@88.069,48.905 ; 76.191,48.616 cw(c76.191,49.229) 75.757,48.795 ccw(c76.191,49.229) 76.191,48.616 ; 76.191,48.616 ccw(c76.191,48.002) 75.757,48.436 cw(c76.191,48.002) 76.191,48.616
  Bottom Layer w0.254: J6.2@79.281,48.555 J6.2@80.069,48.555 87.719,48.555 J6.1@88.069,48.905 ; J6.2@80.794,48.555 cw(c80.794,49.817) 79.901,48.924 ccw(c80.794,49.817) J6.2@80.794,48.555 ; J6.2@80.794,48.555 ccw(c80.794,47.292) 79.901,48.185 cw(c80.794,47.292) J6.2@80.794,48.555
NetC7_1: C7.1 pad.StartPad U2.15 U3.15 U4.15 U5.15 | length 95.9
  Top Layer w0.254: U5.15@64.119,31.786 65.352,31.786 ; U4.15@64.119,40.142 65.326,40.142 ; U3.15@64.119,48.499 65.301,48.499 ; U2.15@64.119,56.856 67.134,56.856 67.803,56.187 67.803,49.202 ; v1(65.697,32.131) 65.352,31.786 ; v1(65.697,40.513) 65.326,40.142 ; v1(65.697,48.895) 65.301,48.499 ; v1@67.872,32.219 ccw(c67.448,32.375) 67.839,32.6 ccw(c68.23,32.826) v1@68.153,32.381 ; v1@67.872,40.601 ccw(c67.448,40.757) 67.839,40.982 ccw(c68.23,41.208) v1@68.153,40.763 ; v1@67.902,32.277 ccw(c67.402,32.627) 67.931,32.932 ; v1@67.902,40.659 ccw(c67.402,41.009) 67.931,41.314 ; v1@68.086,40.26 cw(c68.052,39.91) 68.357,40.086 cw(c68.661,40.262) v1@68.341,40.408 ; v1@68.086,48.642 cw(c68.052,48.292) 68.357,48.468 cw(c68.661,48.644) v1@68.341,48.79 ; 68.13,32.587 cw(c67.762,32.375) v1(68.11,32.131) ; 68.13,40.969 cw(c67.762,40.757) v1(68.11,40.513) ; v1(72.301,40.513) 72.682,40.132 C7.1@74.054,40.132 ; 65.301,48.499 cw(c65.648,48.152) 65.68,48.642 ccw(c65.648,48.152) 65.301,48.499 ; 65.301,48.499 ccw(c64.954,48.846) 65.444,48.878 cw(c64.954,48.846) 65.301,48.499 ; 65.326,40.142 cw(c65.619,39.85) 65.667,40.261 ccw(c65.619,39.85) 65.326,40.142 ; 65.326,40.142 ccw(c65.034,40.435) 65.445,40.483 cw(c65.034,40.435) 65.326,40.142 ; 65.352,31.786 cw(c65.594,31.544) 65.653,31.881 ccw(c65.594,31.544) 65.352,31.786 ; 65.352,31.786 ccw(c65.11,32.028) 65.447,32.087 cw(c65.11,32.028) 65.352,31.786 ; 67.803,32.438 cw(c67.631,32.266) 67.866,32.2 ccw(c67.631,32.266) 67.803,32.438 ; 67.803,32.438 ccw(c67.975,32.61) 68.041,32.375 cw(c67.975,32.61) 67.803,32.438 ; 67.803,32.438 67.803,37.031 68.389,37.617 68.389,40.234 ; 67.803,32.438 v1(68.11,32.131) ; 67.803,40.82 cw(c67.631,40.648) 67.866,40.582 ccw(c67.631,40.648) 67.803,40.82 ; 67.803,40.82 ccw(c67.975,40.992) 68.041,40.757 cw(c67.975,40.992) 67.803,40.82 ; 67.803,40.82 67.803,45.54 68.389,46.125 68.389,48.616 ; 67.803,40.82 v1(68.11,40.513) ; 67.803,49.202 cw(c67.631,49.03) 67.866,48.964 ccw(c67.631,49.03) 67.803,49.202 ; 67.803,49.202 ccw(c67.975,49.374) 68.041,49.139 cw(c67.975,49.374) 67.803,49.202 ; 67.803,49.202 v1(68.11,48.895) ; v1(68.11,32.131) cw(c68.85,32.871) 67.803,32.871 ccw(c68.85,32.871) v1(68.11,32.131) ; v1(68.11,40.513) cw(c68.85,41.253) 67.803,41.253 ccw(c68.85,41.253) v1(68.11,40.513) ; v1(68.11,40.513) cw(c67.436,39.839) 68.389,39.839 ccw(c67.436,39.839) v1(68.11,40.513) ; v1(68.11,40.513) 68.389,40.234 ; v1(68.11,48.895) cw(c67.436,48.221) 68.389,48.221 ccw(c67.436,48.221) v1(68.11,48.895) ; v1(68.11,48.895) 68.389,48.616 ; 68.389,40.234 cw(c68.516,40.361) 68.348,40.424 ccw(c68.516,40.361) 68.389,40.234 ; 68.389,40.234 ccw(c68.262,40.107) 68.199,40.275 cw(c68.262,40.107) 68.389,40.234 ; 68.389,48.616 cw(c68.516,48.743) 68.348,48.806 ccw(c68.516,48.743) 68.389,48.616 ; 68.389,48.616 ccw(c68.262,48.489) 68.199,48.657 cw(c68.262,48.489) 68.389,48.616 ; 73.44,40.132 cw(c73.44,39.519) 73.874,39.952 ccw(c73.44,39.519) 73.44,40.132 ; 73.44,40.132 ccw(c73.44,40.745) 73.874,40.312 cw(c73.44,40.745) 73.44,40.132 ; 67.803,33.484 ccw(c69.463,33.484) 68.29,32.311 cw(c69.463,33.484) 67.803,33.484 ; 67.803,41.866 ccw(c69.463,41.866) 68.29,40.693 cw(c69.463,41.866) 67.803,41.866 ; v1@67.93,40.333 cw(c66.823,39.226) 68.389,39.226 ccw(c66.823,39.226) v1@67.93,40.333 ; v1@67.93,48.715 cw(c66.823,47.608) 68.389,47.608 ccw(c66.823,47.608) v1@67.93,48.715
  Bottom Layer w0.254: v1(65.697,32.131) v1(68.11,32.131) ; v1(65.697,40.513) v1(68.11,40.513) v1(72.301,40.513) ; v1(65.697,48.895) v1(68.11,48.895) ; 66.31,32.131 cw(c66.31,32.744) 65.877,32.311 ccw(c66.31,32.744) 66.31,32.131 ; 66.31,32.131 ccw(c66.31,31.518) 65.877,31.951 cw(c66.31,31.518) 66.31,32.131 ; 66.31,40.513 cw(c66.31,41.126) 65.877,40.693 ccw(c66.31,41.126) 66.31,40.513 ; 66.31,40.513 ccw(c66.31,39.9) 65.877,40.333 cw(c66.31,39.9) 66.31,40.513 ; 66.31,48.895 cw(c66.31,49.508) 65.877,49.075 ccw(c66.31,49.508) 66.31,48.895 ; 66.31,48.895 ccw(c66.31,48.282) 65.877,48.715 cw(c66.31,48.282) 66.31,48.895 ; 67.497,32.131 cw(c67.497,31.518) 67.93,31.951 ccw(c67.497,31.518) 67.497,32.131 ; 67.497,32.131 ccw(c67.497,32.744) 67.93,32.311 cw(c67.497,32.744) 67.497,32.131 ; 67.497,40.513 cw(c67.497,39.9) 67.93,40.333 ccw(c67.497,39.9) 67.497,40.513 ; 67.497,40.513 ccw(c67.497,41.126) 67.93,40.693 cw(c67.497,41.126) 67.497,40.513 ; 67.497,48.895 cw(c67.497,48.282) 67.93,48.715 ccw(c67.497,48.282) 67.497,48.895 ; 67.497,48.895 ccw(c67.497,49.508) 67.93,49.075 cw(c67.497,49.508) 67.497,48.895 ; 68.723,40.513 cw(c68.723,41.126) 68.29,40.693 ccw(c68.723,41.126) 68.723,40.513 ; 68.723,40.513 ccw(c68.723,39.9) 68.29,40.333 cw(c68.723,39.9) 68.723,40.513 ; 71.688,40.513 cw(c71.688,39.9) 72.121,40.333 ccw(c71.688,39.9) 71.688,40.513 ; 71.688,40.513 ccw(c71.688,41.126) 72.121,40.693 cw(c71.688,41.126) 71.688,40.513
NetC7_2: C7.2 J7.1 J7.2 | length 23
  Top Layer w0.254: C7.2@75.578,40.132 75.623,40.086 J7.2@79.281,40.086 ; J7.1@88.069,34.036 J7.1@88.069,40.436
  Bottom Layer w0.254: J7.2@79.281,40.086 J7.2@80.069,40.086 87.719,40.086 J7.1@88.069,40.436 ; J7.2@80.794,40.086 cw(c80.794,41.349) 79.901,40.456 ccw(c80.794,41.349) J7.2@80.794,40.086 ; J7.2@80.794,40.086 ccw(c80.794,38.824) 79.901,39.716 cw(c80.794,38.824) J7.2@80.794,40.086
NetC8_1: C8.1 U2.11 U3.11 U4.11 U5.11 | length 51.2
  Top Layer w0.254: U5.11@64.119,29.186 66.308,29.186 v1(66.332,29.21) 66.432,29.31 66.432,37.592 ; U4.11@64.119,37.542 66.383,37.542 66.432,37.592 ; U3.11@64.119,45.899 66.38,45.899 66.432,45.847 ; U2.11@64.119,54.256 65.771,54.256 66.432,53.594 66.432,45.847 ; v1(73.317,29.21) 74.054,29.947 C8.1@74.054,31.521 ; 66.432,37.592 66.432,45.847 ; 74.054,30.908 cw(c74.667,30.908) 74.233,31.342 ccw(c74.667,30.908) 74.054,30.908 ; 74.054,30.908 ccw(c73.44,30.908) 73.874,31.342 cw(c73.44,30.908) 74.054,30.908 ; v1@66.152,29.39 ccw(c65.476,30.066) 66.432,30.066 cw(c65.476,30.066) v1@66.152,29.39 ; 66.432,29.581 ccw(c66.703,29.581) 66.512,29.39 cw(c66.703,29.581) 66.432,29.581
  Bottom Layer w0.254: v1(66.332,29.21) v1(73.317,29.21) ; 66.945,29.21 cw(c66.945,29.823) 66.512,29.39 ccw(c66.945,29.823) 66.945,29.21 ; 66.945,29.21 ccw(c66.945,28.597) 66.512,29.03 cw(c66.945,28.597) 66.945,29.21 ; 72.704,29.21 cw(c72.704,28.597) 73.137,29.03 ccw(c72.704,28.597) 72.704,29.21 ; 72.704,29.21 ccw(c72.704,29.823) 73.137,29.39 cw(c72.704,29.823) 72.704,29.21
NetC8_2: C8.2 J8.1 J8.2 | length 25
  Top Layer w0.254: C8.2@75.578,31.521 79.185,31.521 J8.2@79.281,31.618 ; J8.1@88.069,25.568 J8.1@88.069,31.968 ; 76.191,31.521 cw(c76.191,32.135) 75.757,31.701 ccw(c76.191,32.135) 76.191,31.521 ; 76.191,31.521 ccw(c76.191,30.908) 75.757,31.342 cw(c76.191,30.908) 76.191,31.521
  Bottom Layer w0.254: J8.2@79.281,31.618 J8.2@80.069,31.618 85.458,31.618 ; 85.458,31.624 87.725,31.624 J8.1@88.069,31.968 ; J8.2@80.794,31.618 cw(c80.794,32.881) 79.901,31.988 ccw(c80.794,32.881) J8.2@80.794,31.618 ; J8.2@80.794,31.618 ccw(c80.794,30.355) 79.901,31.248 cw(c80.794,30.355) J8.2@80.794,31.618
NetC13_2: C13.2 U1.5 Y1.1 | length 13.7
  Top Layer w0.254: C13.2@26.271,34.468 30.568,34.468 30.568,33.422 31.464,32.525 U1.5@36.677,32.525 ; 26.884,34.468 cw(c26.884,35.081) 26.45,34.647 ccw(c26.884,35.081) 26.884,34.468 ; 26.884,34.468 ccw(c26.884,33.855) 26.45,34.288 cw(c26.884,33.855) 26.884,34.468
NetC14_2: C14.2 U1.6 Y1.2 | length 14.3
  Top Layer w0.254: C14.2@26.322,29.439 30.517,29.439 30.517,31.043 31.499,32.025 U1.6@36.677,32.025 ; 26.935,29.439 cw(c26.935,30.052) 26.501,29.618 ccw(c26.935,30.052) 26.935,29.439 ; 26.935,29.439 ccw(c26.935,28.825) 26.501,29.259 cw(c26.935,28.825) 26.935,29.439
NetJ5_3: J5.3 U2.1 U3.1 U4.1 U5.1 | length 113.7
  Top Layer w0.254: U5.1@58.179,32.436 60.42,32.436 62.553,34.569 64.06,34.569 v1(64.924,35.433) ; U4.1@58.179,40.792 60.304,40.792 62.31,42.798 63.918,42.798 64.924,43.805 v1(65.061,43.805) cw(c64.506,44.018) 64.66,43.443 ; U3.1@58.179,49.149 60.13,49.149 62.237,51.257 63.994,51.257 64.578,51.841 ; U2.1@58.179,57.506 59.909,57.506 61.991,59.588 67.992,59.588 69.631,57.949 69.631,52.962 v1(69.888,52.705) 69.888,52.314 ; v1(64.96,52.095) 64.706,51.841 64.578,51.841 ; v1(69.888,35.941) 70.243,36.296 70.243,43.704 69.888,44.059 ; 64.578,51.841 cw(c64.728,51.691) 64.833,51.875 ccw(c64.728,51.691) 64.578,51.841 ; 69.888,44.059 cw(c70.063,44.059) 69.992,44.218 ccw(c70.063,44.059) 69.888,44.059 ; 69.888,44.059 ccw(c69.713,44.059) 69.784,44.218 cw(c69.713,44.059) 69.888,44.059 ; 69.888,44.059 v1(69.888,44.45) 69.888,44.963 ; 69.888,44.963 cw(c69.497,44.963) 69.734,44.652 ccw(c69.497,44.963) 69.888,44.963 ; 69.888,44.963 ccw(c70.279,44.963) 70.042,44.652 cw(c70.279,44.963) 69.888,44.963 ; 69.888,44.963 70.287,45.362 70.287,51.915 69.888,52.314 ; 69.888,52.314 cw(c70.063,52.314) 69.992,52.473 ccw(c70.063,52.314) 69.888,52.314 ; 69.888,52.314 ccw(c69.713,52.314) 69.784,52.473 cw(c69.713,52.314) 69.888,52.314 ; 64.394,43.275 cw(c65.061,42.607) 65.061,43.551 ccw(c65.061,42.607) 64.394,43.275 ; 64.617,51.88 ccw(c64.401,52.095) 64.706,52.095 cw(c64.401,52.095) 64.617,51.88 ; 64.724,43.605 ccw(c64.525,43.805) 64.807,43.805 cw(c64.525,43.805) 64.724,43.605
  Bottom Layer w0.254: v1(64.924,35.433) 69.263,35.433 ; v1@65.049,52.333 ccw(c65.204,52.75) 65.427,52.365 ccw(c65.649,51.979) v1@65.21,52.053 ; v1(65.061,43.805) 68.872,43.805 69.212,44.145 ; 69.089,52.527 cw(c69.392,52.003) v1@69.742,52.497 ; 69.433,52.726 cw(c69.644,52.36) v1(69.888,52.705) ; v1@69.638,52.747 cw(c69.199,52.821) 69.421,52.435 cw(c69.644,52.05) v1@69.799,52.467 ; v1(69.888,35.941) 69.771,35.941 69.263,35.433 ; J5.3@80.069,51.323 76.619,51.323 71.27,51.323 v1(69.888,52.705) ; v1(64.96,52.095) cw(c65.696,51.359) 65.696,52.4 ccw(c65.696,51.359) v1(64.96,52.095) ; v1(64.96,52.095) 65.265,52.4 69.583,52.4 v1(69.888,52.705) ; 65.537,35.433 cw(c65.537,36.046) 65.103,35.613 ccw(c65.537,36.046) 65.537,35.433 ; 65.537,35.433 ccw(c65.537,34.82) 65.103,35.253 cw(c65.537,34.82) 65.537,35.433 ; 65.674,43.805 cw(c65.674,44.418) 65.241,43.985 ccw(c65.674,44.418) 65.674,43.805 ; 65.674,43.805 ccw(c65.674,43.192) 65.241,43.625 cw(c65.674,43.192) 65.674,43.805 ; 69.213,44.145 ccw(c69.213,44.579) 69.638,44.498 cw(c69.213,44.579) 69.213,44.145 ; 69.212,44.145 69.583,44.145 v1(69.888,44.45) ; 69.264,35.433 cw(c69.877,34.82) 69.885,35.687 ccw(c69.877,34.82) 69.264,35.433 ; v1(69.888,44.45) cw(c69.519,44.52) 69.519,44.145 ccw(c69.519,44.52) v1(69.888,44.45) ; v1(69.888,52.705) cw(c69.152,53.441) 69.152,52.4 ccw(c69.152,53.441) v1(69.888,52.705) ; 70.322,52.271 cw(c70.755,52.705) 70.142,52.705 ccw(c70.755,52.705) 70.322,52.271 ; 70.322,52.271 ccw(c69.888,51.838) 69.888,52.451 cw(c69.888,51.838) 70.322,52.271 ; v1@65.14,51.915 cw(c66.31,50.745) 66.31,52.4 ccw(c66.31,50.745) v1@65.14,51.915 ; 68.538,52.4 ccw(c68.538,54.055) 69.708,52.885 cw(c68.538,54.055) 68.538,52.4 ; 69.537,35.706 ccw(c69.302,35.941) 69.634,35.941 cw(c69.302,35.941) 69.537,35.706